# Altium PCB CL-HC-SubV2.0(change).PcbDoc (part 2 of 2)
Units mm, origin at the board's own origin, x right, y up, seen from the top; angles counter-clockwise.
Board outline 326.29 x 232.51 mm, 2 copper layers (TopLayer, BottomLayer); 149 components, 528 nets, 577 pads, 1 vias.
Unrouted connection lines stored in the file: 44.
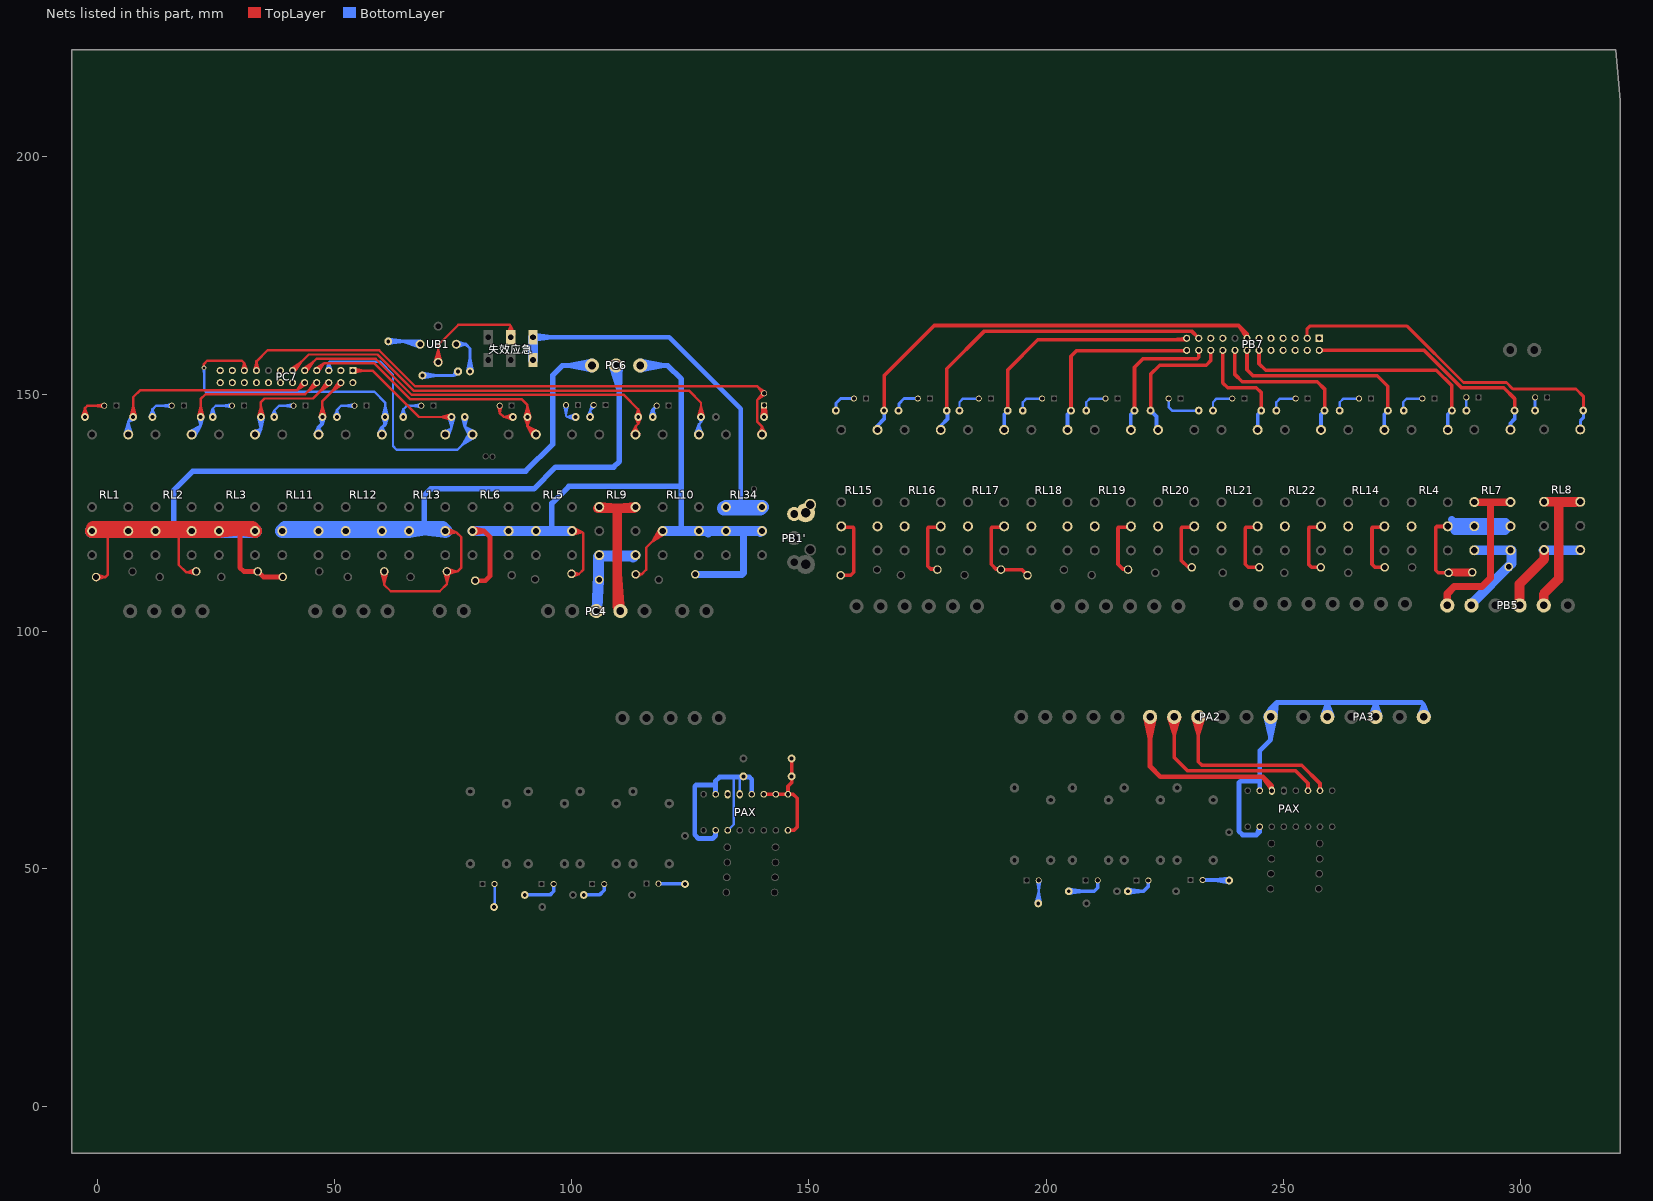
[diagram p2: the nets of this part, all layers, seen from the top]

## Via types
v1: diameter 1.016, hole 0.61, TopLayer to BottomLayer, tented both sides, 1 vias

## Nets (pads, with @x,y where several pads share a name; then routed paths per layer and width w, separated by ;. In a path a pad name is that pad's centre, name@x,y a point inside that pad or via, vN(x,y) a via of type N, cw(c..) or ccw(c..) an arc to the next point about the centre after c; other vN are vias at no path point) (continued)
GND: D110.K PA2.1 PA3.2 PA3.4 PA3.6 PAX.3 PAX.4 PAX.6@132.874,58.097 PAX.7@135.414,65.717 PAX.9@137.954,65.717 PB7.17 PC7.17 R220.2 RL34.1 | length 329.1
  TopLayer w0.508: PC7.17@33.096,155.044 33.588,156.905 ; PC7.17@34.079,155.044 33.588,156.905 ; RL34.1@139.35,141.675 140.124,143.193 ; RL34.1@139.837,141.514 140.124,143.193 ; RL34.1@140.124,141.489 140.124,143.193 ; D110.K@140.283,149.979 139.111,151.638 ; D110.K@140.283,150.425 139.087,148.742 ; RL34.1@140.411,141.514 140.124,143.193 ; D110.K@140.771,150.466 139.111,151.638 ; D110.K@140.771,149.937 139.087,148.742 ; RL34.1@140.898,141.675 140.124,143.193 ; 33.588,156.905 PC7.17@33.588,154.98 33.588,156.905 ; 33.588,156.905 35.941,159.258 59.436,159.258 67.056,151.638 139.111,151.638 ; 139.087,148.742 D110.K@140.548,150.202 ; 139.087,148.742 D110.K@140.548,150.202 ; 139.087,148.742 139.087,144.23 140.124,143.193 ; 139.111,151.638 D110.K@140.548,150.202
  BottomLayer w0.508: PAX.6@132.874,58.097 134.144,59.367 134.144,69.342 ; PAX.7@135.414,65.717 R220.2@135.414,69.342
  BottomLayer w1.016: PAX.4@130.334,58.097 130.334,57.028 129.705,56.399 126.72,56.399 125.935,57.184 125.935,67.411 126.217,67.693 130.334,67.693 ; PAX.3@130.334,65.717 130.334,67.693 ; PAX.9@137.954,65.717 137.954,68.834 137.446,69.342 135.414,69.342 134.144,69.342 131.159,69.342 130.334,68.517 130.334,67.693 ; PAX.3@244.973,66.479 244.973,68.455 ; PA2.1@246.286,81.906 247.272,77.466 ; PA2.1@246.425,82.531 248.55,85.062 ; PA2.1@248.234,81.772 248.55,85.062 ; PA2.1@248.258,81.906 247.272,77.466 ; PA3.2@258.24,82.18 259.218,84.97 ; 258.872,85.062 248.55,85.062 ; PA3.2@259.218,82.014 259.218,84.97 ; PA3.2@260.196,82.18 259.218,84.97 ; PA3.4@268.401,82.184 269.378,84.903 ; PA3.4@269.378,82.014 269.378,84.903 ; PA3.4@270.355,82.184 269.378,84.903 ; PA3.6@278.565,82.208 279.538,84.554 ; PA3.6@279.538,82.014 279.538,84.554 ; PA3.6@280.511,82.208 279.538,84.554 ; 244.343,57.161 244.973,57.79 ; 244.343,57.161 241.358,57.161 240.573,57.946 240.573,68.173 240.855,68.455 244.973,68.455 ; 244.343,57.161 PAX.4@244.973,58.859 ; 244.973,57.79 PAX.4@244.973,58.859 ; 244.973,57.79 PAX.4@244.973,58.859 ; 244.973,68.455 244.973,74.909 247.272,77.208 PA2.1@247.272,82.014 ; 247.272,77.466 PA2.1@247.272,82.014 ; PA2.1@247.272,82.014 247.272,83.784 ; PA2.1@247.272,82.014 248.55,85.062 ; PA2.1@247.272,82.014 247.272,83.784 ; 247.272,83.784 248.55,85.062 ; 247.272,83.784 246.32,82.292 247.272,83.784 ; 247.272,83.784 248.224,82.292 247.272,83.784 ; 259.218,84.97 259.126,85.062 269.219,85.062 ; 269.219,85.062 269.378,84.903 ; 269.219,85.062 279.03,85.062 279.538,84.554
IN2-A+: 
IN2-B-: 
IN-A+: 
IN-B-: 
L: pad.0@149.273,125.023 PB1'.3 PB1.2 RL4.4 RL7.4 RL14.4 RL15.4 RL16.4 RL17.4 RL18.4 RL19.4 RL20.4 RL21.4 RL22.4 RN1.1 RN2.1 RN3.1 RN4.1 RN5.1 RN6.1 RN11.1 RN12.1 RN13.1 RN14.1 RN21.1 | length 172.9
  TopLayer w0.762: RN1.1@156.674,111.849 158.819,111.849 159.429,112.46 159.429,121.797 159.217,122.008 RL15.4@156.907,122.008 ; RN2.1@177.238,113.166 175.635,113.166 175.038,113.763 175.038,121.797 175.25,122.008 RL16.4@177.561,122.008 ; RN3.1@190.455,113.053 194.84,113.053 RN4.1@196.044,111.849 ; RN3.1@190.592,113.166 189.373,113.166 188.391,114.148 188.391,121.797 188.603,122.008 RL17.4@190.914,122.008 ; RN5.1@217.298,113.166 216.079,113.166 215.097,114.148 215.097,121.797 215.309,122.008 RL19.4@217.62,122.008 ; RN6.1@230.648,113.166 RN6.1@230.651,113.166 ; RN6.1@230.648,113.517 229.885,113.517 228.451,114.951 228.451,121.797 228.662,122.008 RL20.4@230.973,122.008 ; RL21.4@244.435,122.008 242.124,122.008 241.912,121.797 241.912,114.148 242.543,113.517 RN12.1@244.581,113.517 ; RL22.4@257.788,122.008 255.477,122.008 255.265,121.797 255.265,114.148 255.896,113.517 RN13.1@257.826,113.517 RN13.1@257.934,113.517 ; RL14.4@271.141,122.008 268.83,122.008 268.618,121.797 268.618,114.148 269.249,113.517 RN14.1@271.288,113.517 ; RL4.4@284.564,122.129 282.254,122.129 282.042,121.917 282.042,112.922 282.607,112.357 RN21.1@284.71,112.357
  TopLayer w1.524: RN21.1@284.71,112.357 284.826,112.473 RN11.1@289.745,112.473 ; 286.263,112.357 RN11.1@289.36,112.357
  BottomLayer w1.524: RL4.4@284.584,122.169 284.612,122.197 RL7.4@290.173,122.197 RL7.4@297.793,122.197 ; 285.431,123.619 285.895,123.155 296.835,123.155 RL7.4@297.793,122.197 ; 285.895,121.239 286.026,121.109 296.704,121.109 RL7.4@297.793,122.197
LAMP1: 
LAMP2: 
LAMP3: 
LAMP4: 
LAMP5: 
LAMP6: 
LAMP7: 
LAMP8: 
LAMP9: 
LAMP10: 
LAMP11: 
LAMP12: 
LAMP13: 
LAMP14: 
LOUT1: 
LOUT2: 
LOUT3: 
LOUT4: 
LOUT5: 
LOUT6: 
LOUT7: 
LOUT8: 
LOUT9: 
LOUT10: 
LOUT11: 
LOUT12: 
LOUT13: 
LOUT14: 
L加热: PC6.2 RL11.4 RL12.4 RL13.4 RN10.1 RN17.1 | length 311.1
  TopLayer w0.508: RN10.1@59.885,112.569 60.525,110.231 RN10.1@61.165,112.569 ; RN10.1@60.525,112.655 60.525,109.824 61.873,108.476 72.198,108.476 73.733,110.011 RN17.1@73.733,112.655 75.969,112.655 ; RN17.1@73.093,112.569 73.733,110.231 RN17.1@74.373,112.569 ; RL13.4@73.334,120.884 74.465,120.873 ; RL13.4@73.355,120.882 75.764,120.873 ; RL13.4@73.407,120.374 75.764,120.873 ; RL13.4@73.425,121.452 75.764,120.873 ; RL13.4@73.448,120.377 74.465,120.873 ; RL13.4@73.483,121.435 74.465,120.873 ; RL13.4@73.6,121.932 75.764,120.873 ; RN17.1@73.826,112.016 75.969,112.655 ; RN17.1@73.826,113.294 75.969,112.655 ; RL13.4@73.838,121.815 74.465,120.873 ; 74.465,120.873 75.764,120.873 ; 74.465,120.873 RL13.4@73.373,121.169 75.764,120.873 ; 75.764,120.873 76.768,119.869 76.768,113.455 75.969,112.655
  BottomLayer w1.143: 68.99,121.751 68.99,128.745 70.303,130.058 92.024,130.058 96.592,134.626 108.844,134.626 110.045,135.827 110.045,155.373 PC6.2@109.368,156.05 110.045,150.909 ; PC6.2@108.462,155.847 110.045,150.909 ; PC6.2@110.296,156.088 110.045,150.909
  BottomLayer w3: 42.218,121.751 RL12.4@52.396,121.169 ; 49.83,121.751 RL12.4@60.016,121.169 ; 55.564,121.751 RL13.4@65.753,121.169 ; RL11.4@39.039,121.169 RL11.4@39.62,121.751 ; RL11.4@39.039,121.169 49.351,121.751 RL11.4@46.659,121.169 ; RL11.4@39.039,121.169 RL11.4@46.659,121.169 ; RL11.4@39.62,121.751 68.99,121.751 ; RL11.4@39.62,121.751 RL11.4@46.659,121.169 ; RL11.4@46.659,121.169 56.846,121.751 RL12.4@52.396,121.169 ; RL11.4@46.659,121.169 RL12.4@52.396,121.169 ; RL12.4@52.396,121.169 62.579,121.751 RL12.4@60.016,121.169 ; RL12.4@52.396,121.169 RL12.4@60.016,121.169 ; RL12.4@60.016,121.169 68.99,121.751 ; RL12.4@60.016,121.169 RL13.4@65.753,121.169 ; RL13.4@65.753,121.169 68.99,121.751 ; RL13.4@65.753,121.169 68.99,121.751 ; 68.99,121.751 72.791,121.751 RL13.4@73.373,121.169 68.99,121.751
L变频: PC6.3 RL5.4 RL6.4 RL10.4 RL34.4 RN8.1 RN9.1 RN23.1 RN24.1 | length 240.9
  TopLayer w0.508: RL5.4@99.96,120.909 102.271,120.909 ; RN8.1@99.97,112.164 101.501,112.067 ; RN8.1@100.066,111.525 101.501,112.067 ; RL5.4@100.072,120.882 102.271,120.909 ; RL5.4@100.087,121.169 102.271,120.909 ; RL5.4@100.138,120.375 102.271,120.909 ; RL5.4@100.14,121.452 102.271,120.909 ; RN8.1@100.145,112.786 101.501,112.067 ; RN8.1@100.283,112.067 101.501,112.067 ; RL5.4@100.323,121.93 102.271,120.909 ; RN23.1@113.476,112.043 114.695,112.043 ; RN23.1@113.647,111.42 114.695,112.043 ; RN23.1@113.647,112.666 114.695,112.043 ; RL10.4@118.547,121.649 117.07,119.033 ; RL10.4@118.898,120.861 115.676,117.639 115.676,113.025 114.695,112.043 ; RL10.4@118.968,121.362 117.07,119.033 ; RL10.4@119.182,121.169 117.07,119.033 ; RL10.4@119.377,120.957 117.07,119.033 ; RL10.4@119.669,120.54 117.07,119.033 ; 101.501,112.067 102.483,113.049 102.483,120.697 102.271,120.909
  TopLayer w1: RL6.4@79.11,121.169 81.58,121.169 ; RL6.4@79.171,120.623 81.58,121.169 ; RL6.4@79.171,121.716 81.58,121.169 ; RN9.1@79.682,110.712 81.834,110.712 82.798,111.676 82.798,119.951 81.58,121.169
  BottomLayer w1.143: 95.811,121.169 95.811,127.014 99.398,130.601 123.098,130.601 ; PC6.3@114.448,156.05 120.223,156.05 123.098,153.175 123.098,130.601 ; PC6.3@114.535,155.126 119.377,156.05 PC6.3@114.535,156.974 ; 123.061,121.266 123.098,121.303 123.098,130.601
  BottomLayer w1.524: RN24.1@126.04,112.043 135.911,112.043 136.192,112.324 136.192,120.861 ; RL10.4@126.802,121.169 128.791,120.618 128.548,120.861 RL10.4@126.802,121.169
  BottomLayer w2.032: RL6.4@79.11,121.169 RL6.4@86.73,121.169 RL5.4@92.467,121.169 95.811,121.169 ; RL10.4@119.182,121.169 RL10.4@126.802,121.169 RL34.4@132.504,121.169 139.429,121.169 RL34.4@139.713,120.885 ; RL34.4@132.978,121.169 RL34.4@140.124,121.169 ; 95.811,121.169 RL5.4@100.087,121.169 95.811,121.169
L预热: PC6.1 RL1.4 RL2.4 RL3.4 RN15.1 RN18.1 RN19.1 RN20.1 | length 393.6
  TopLayer w0.508: RL1.4@-1.037,121.457 1.563,121.347 ; RL1.4@-1.033,121.169 1.563,121.347 ; RL1.4@-0.997,120.883 1.563,121.347 ; RL1.4@-0.965,121.962 1.563,121.347 ; RL1.4@-0.858,120.393 1.563,121.347 ; RL1.4@-0.289,121.347 2.021,121.347 2.233,121.136 2.233,111.915 1.796,111.478 ; RN18.1@-0.204,111.478 1.796,111.478 ; RN18.1@-0.1,110.841 1.796,111.478 ; RN18.1@-0.1,112.116 1.796,111.478 ; RL2.4@19.747,121.94 17.364,120.921 ; RL2.4@19.898,120.375 17.364,120.921 ; RL2.4@19.901,121.454 17.364,120.921 ; RL2.4@19.944,121.169 17.364,120.921 ; RL2.4@19.956,120.881 17.364,120.921 ; RN19.1@20.731,113.278 18.846,112.43 ; RL2.4@20.738,120.921 17.233,120.921 17.233,114.043 18.846,112.43 ; RN19.1@20.87,112.01 18.846,112.43 ; RN19.1@20.884,112.43 18.846,112.43 ; RN19.1@20.901,112.655 18.846,112.43
  TopLayer w1: 30.122,121.751 30.122,113.431 30.898,112.655 RN20.1@33.855,112.655 35.015,111.495 RN15.1@39.129,111.495
  TopLayer w3: 2.146,121.751 RL2.4@12.324,121.169 ; 9.194,121.751 RL1.4@-1.033,121.169 RL1.4@6.587,121.169 ; 15.492,121.751 RL3.4@25.681,121.169 ; 22.503,121.751 RL2.4@12.324,121.169 ; RL1.4@6.587,121.169 16.772,121.751 RL2.4@12.324,121.169 ; RL1.4@6.587,121.169 -0.777,121.751 RL3.4@25.681,121.751 ; RL1.4@6.587,121.169 RL2.4@12.324,121.169 ; RL2.4@12.324,121.169 RL2.4@19.944,121.169 ; RL2.4@12.324,121.169 9.758,121.751 RL2.4@19.944,121.169 ; RL2.4@19.944,121.169 RL3.4@25.681,121.751 ; RL2.4@19.944,121.169 RL3.4@25.681,121.169 ; RL3.4@25.681,121.169 30.122,121.751 ; RL3.4@25.681,121.751 30.122,121.751 ; 30.122,121.751 32.72,121.751 RL3.4@33.301,121.169 30.122,121.751
  BottomLayer w1.143: 16.198,121.576 16.198,129.776 20.198,133.776 90.323,133.776 96.023,139.476 96.023,154.05 98.023,156.05 PC6.1@104.288,156.05 ; PC6.1@104.201,155.126 99.359,156.05 PC6.1@104.201,156.974
  BottomLayer w3: RL1.4@-1.033,121.169 RL1.4@6.587,121.169 RL2.4@12.324,121.169 RL2.4@19.944,121.169 RL3.4@25.681,121.169 RL3.4@33.301,121.169
NetC1_1: 
NetC14_1: 
NetC43_2: 
NetC44_2: 
NetD1_A: 
NetD6_A: 
NetD7_A: 
NetD8_A: 
NetD9_A: 
NetD10_A: 
NetD11_A: 
NetD12_A: 
NetD13_A: 
NetD14_A: 
NetD15_A: 
NetD15_K: D15.K R215.1 | length 20.6
  BottomLayer w0.762: D15.K@118.301,46.891 123.79,46.891 R215.1@123.889,46.792 ; D15.K@232.939,47.653 238.428,47.653 R215.1@238.527,47.554 235.411,47.653 ; R215.1@238.482,47.112 235.411,47.653 ; R215.1@238.51,47.999 235.411,47.653
NetD16_A: 
NetD16_K: D16.K R216.1 | length 18.2
  BottomLayer w0.762: R216.1@102.553,44.506 105.855,44.506 106.871,45.522 D16.K@106.871,46.792 ; R216.1@217.191,45.268 220.493,45.268 221.509,46.284 D16.K@221.509,47.554 ; R216.1@217.223,44.825 220.303,45.268 R216.1@217.223,45.712
NetD17_A: 
NetD17_K: D17.K R217.1 | length 22.1
  BottomLayer w0.762: R217.1@90.107,44.506 95.441,44.506 96.203,45.268 D17.K@96.203,46.806 ; R217.1@204.745,45.268 210.079,45.268 210.841,46.03 D17.K@210.841,47.568 ; R217.1@204.777,44.825 207.857,45.268 R217.1@204.777,45.712
NetD18_A: 
NetD18_K: D18.K R218.1 | length 21.1
  BottomLayer w0.508: R218.1@83.655,41.966 83.757,42.068 D18.K@83.757,46.806 ; R218.1@197.73,42.822 198.395,45.083 ; D18.K@198.05,47.539 198.395,45.444 D18.K@198.74,47.539 ; D18.K@198.395,47.568 198.395,42.83 R218.1@198.293,42.728 198.395,45.083 ; R218.1@198.863,42.773 198.395,45.083
NetD19_A: 
NetD20_A: 
NetD21_A: 
NetD22_A: 
NetD23_A: 
NetD24_A: 
NetD25_A: 
NetD26_A: 
NetD27_A: 
NetD28_A: 
NetD29_A: 
NetD30_A: 
NetD31_A: 
NetD32_A: 
NetD33_A: 
NetD34_A: 
NetD35_K: 
NetD36_K: 
NetD37_K: D37.K R147.1 | length 8.5
  BottomLayer w0.508: D37.K@225.768,149.081 225.768,147.303 226.521,146.55 R147.1@232.131,146.55
NetD38_K: D38.K R148.1 | length 6.2
  BottomLayer w0.508: R148.1@208.417,146.541 208.417,148.319 209.179,149.081 D38.K@212.481,149.081
NetD39_K: D39.K R149.1 | length 6.2
  BottomLayer w0.508: R149.1@195.066,146.541 195.066,148.319 195.828,149.081 D39.K@199.13,149.081
NetD40_K: D40.K R150.1 | length 6.2
  BottomLayer w0.508: R150.1@181.715,146.541 181.715,148.319 182.477,149.081 D40.K@185.779,149.081
NetD41_K: D41.K R151.1 | length 5.8
  BottomLayer w0.635: R151.1@169.015,146.541 169.015,148.065 170.031,149.081 D41.K@172.825,149.081
NetD42_K: D42.K R152.1 | length 5.8
  BottomLayer w0.635: R152.1@155.664,146.541 155.664,148.065 156.68,149.081 D42.K@159.474,149.081
NetD43_K: D43.K R153.1 | length 2.8
  BottomLayer w0.635: R153.1@302.984,146.55 D43.K@302.984,149.335
NetD44_K: D44.K R154.1 | length 2.8
  BottomLayer w0.508: R154.1@288.506,146.541 D44.K@288.506,149.335
NetD45_K: D45.K R155.1 | length 6.2
  BottomLayer w0.508: R155.1@261.821,146.541 261.821,148.319 262.583,149.081 D45.K@265.885,149.081
NetD46_K: D46.K R156.1 | length 6.2
  BottomLayer w0.508: R156.1@235.119,146.541 235.119,148.319 235.881,149.081 D46.K@239.183,149.081
NetD47_K: D47.K R157.1 | length 6.2
  BottomLayer w0.508: R157.1@248.47,146.541 248.47,148.319 249.232,149.081 D47.K@252.534,149.081
NetD48_K: D48.K R158.1 | length 6.2
  BottomLayer w0.508: R158.1@275.173,146.541 275.173,148.319 275.935,149.081 D48.K@279.237,149.081
NetD49_K: D49.K R159.1 | length 5.8
  BottomLayer w0.762: R159.1@116.65,145.258 117.09,146.753 ; R159.1@117.09,145.194 117.09,146.753 ; R159.1@117.53,145.258 117.09,146.753 ; D49.K@117.912,147.574 117.09,146.753
NetD50_K: D50.K R160.1 | length 13.8
  BottomLayer w0.508: R160.1@23.817,145.288 24.38,146.935 ; R160.1@24.38,145.194 24.38,146.935 ; R160.1@24.944,145.288 24.38,146.935 ; D50.K@28.42,147.229 26.324,147.574 D50.K@28.42,147.919 ; D50.K@28.448,147.574 25.019,147.574 24.38,146.935
NetD51_K: D51.K R161.1 | length 13.5
  BottomLayer w0.508: R161.1@11.118,145.295 11.68,146.808 ; R161.1@11.68,145.194 11.68,146.808 ; R161.1@12.243,145.295 11.68,146.808 ; D51.K@15.72,147.229 13.624,147.574 D51.K@15.72,147.919 ; D51.K@15.748,147.574 12.446,147.574 11.68,146.808
NetD52_K: D52.K R162.1 | length 14.1
  TopLayer w0.508: R162.1@-3.108,145.282 -2.544,147.062 ; R162.1@-2.544,145.194 -2.544,147.062 ; R162.1@-1.979,145.282 -2.544,147.062 ; D52.K@1.496,147.229 -0.6,147.574 D52.K@1.496,147.919 ; D52.K@1.524,147.574 -2.032,147.574 -2.544,147.062
NetD53_K: D53.K R163.1 | length 13.2
  BottomLayer w0.508: R163.1@63.95,145.295 64.512,146.808 ; R163.1@64.512,145.194 64.512,146.808 ; R163.1@65.075,145.295 64.512,146.808 ; D53.K@68.298,147.229 66.202,147.574 D53.K@68.298,147.919 ; D53.K@68.326,147.574 65.278,147.574 64.512,146.808
NetD54_K: D54.K R164.1 | length 12.8
  BottomLayer w0.508: R164.1@49.982,145.304 50.542,146.681 ; R164.1@50.542,145.194 50.542,146.681 ; R164.1@51.103,145.304 50.542,146.681 ; D54.K@54.217,147.229 52.121,147.574 D54.K@54.217,147.919 ; D54.K@54.245,147.574 51.435,147.574 50.542,146.681
NetD55_K: D55.K R165.1 | length 12.8
  BottomLayer w0.508: R165.1@36.776,145.314 37.334,146.554 ; R165.1@37.334,145.194 37.334,146.554 ; R165.1@37.893,145.314 37.334,146.554 ; D55.K@41.374,147.229 39.278,147.574 D55.K@41.374,147.919 ; D55.K@41.402,147.574 38.354,147.574 37.334,146.554
NetD56_K: 
NetD57_K: 
NetD58_K: 
NetD59_K: 
NetD60_K: 
NetD61_K: D61.K R171.1 | length 11.5
  TopLayer w0.508: D61.K@84.492,147.534 84.836,146.07 ; D61.K@84.836,147.574 84.836,146.07 ; D61.K@85.18,147.534 84.836,146.07 ; R171.1@87.545,144.629 85.712,145.194 ; R171.1@87.545,145.759 85.712,145.194 ; R171.1@87.63,145.194 85.712,145.194 ; 84.836,146.07 85.712,145.194
NetD62_K: 
NetD63_K: 
NetD64_K: 
NetD65_K: D65.K R175.1 | length 12.2
  BottomLayer w0.508: D65.K@98.461,147.673 98.806,145.577 D65.K@99.151,147.673 ; D65.K@98.806,147.701 98.806,145.457 99.068,145.194 ; R175.1@100.755,144.63 99.068,145.194 ; R175.1@100.755,145.758 99.068,145.194 ; R175.1@100.847,145.194 99.068,145.194
NetD66_K: 
NetD67_K: D67.K R177.1 | length 9.7
  BottomLayer w0.508: R177.1@103.327,145.312 103.886,146.584 ; R177.1@103.886,145.194 103.886,146.584 ; D67.K@104.318,147.875 103.886,146.584 ; R177.1@104.445,145.312 103.886,146.584 ; D67.K@104.893,147.5 103.886,146.584 ; 103.886,146.584 104.629,147.328 D67.K@104.629,147.724 103.886,146.584
NetD71_A: 
NetD72_K: 
NetD73_K: 
NetD74_A: 
NetD74_K: 
NetD75_A: 
NetD75_K: 
NetD76_K: 
NetD77_K: 
NetD78_K: 
NetD79_K: 
NetD80_K: 
NetD81_K: 
NetD82_K: 
NetD83_K: 
NetD84_K: 
NetD85_K: 
NetD86_K: 
NetD87_K: 
NetD88_K: 
NetD89_K: 
NetD90_K: 
NetD91_K: 
NetD92_K: 
NetD93_K: 
NetD94_K: 
NetD95_A: 
NetD96_A: 
NetD97_A: 
NetD98_A: 
NetD99_A: 
NetD100_A: 
NetD101_A: 
NetD102_A: 
NetD103_A: 
NetD104_A: 
NetD105_A: 
NetD106_A: 
NetD106_K: 
NetD107_A: 
NetD107_K: 
NetD108_A: 
NetD108_K: 
NetD109_A: 
NetD110_A: D110.A R292.2 | length 35.1
  TopLayer w0.508: R292.2@139.981,145.264 D110.A@140.548,147.544 ; D110.A@140.206,147.713 R292.2@140.059,145.577 ; D110.A@140.218,147.556 R292.2@141.037,145.577 ; D110.A@140.877,147.556 R292.2@140.059,145.577 ; D110.A@140.89,147.713 R292.2@141.037,145.577 ; R292.2@141.115,145.264 D110.A@140.548,147.544 ; R292.2@140.059,145.577 D110.A@140.548,147.662 ; R292.2@140.548,145.538 140.893,147.634 R292.2@140.548,145.538 ; R292.2@140.548,145.538 140.203,147.634 R292.2@140.548,145.538 ; R292.2@140.548,145.538 D110.A@140.548,147.662 ; R292.2@140.548,145.538 D110.A@140.548,147.662 ; D110.A@140.548,147.544 R292.2@140.548,145.194 D110.A@140.548,147.662 ; D110.A@140.548,147.662 R292.2@141.037,145.577
NetD199_A: 
NetDZ1_K: 
NetF1_1: 
NetF2_1: 
NetF3_1: 
NetF4_1: 
NetF5_1: 
NetF6_1: 
NetF9_2: 
NetQ1_1: 
NetQ1_2: 
NetQ2_2: 
NetQ3_2: 
NetQ4_1: 
NetQ4_2: 
NetQ5_1: 
NetQ5_2: 
NetQ6_2: 
NetQ7_1: 
NetQ7_2: 
NetQ8_2: 
NetQ9_1: 
NetQ9_2: 
NetQ10_2: 
NetQ11_2: 
NetQ12_2: 
NetQ13_1: 
NetQ13_2: 
NetQ13_3: 
NetQ14_1: 
NetQ15_2: 
NetQ15_3: 
NetQ16_2: 
NetQ17_2: 
NetQ18_1: 
NetQ18_2: 
NetQ18_3: 
NetQ19_1: 
NetQ19_2: 
NetQ20_2: 
NetQ21_2: 
NetQ22_2: 
NetQ23_2: 
NetQ24_2: 
NetQ25_2: 
NetR15_2: 
NetR16_2: 
NetR17_2: 
NetR18_2: 
NetR19_2: 
NetR20_2: 
NetR21_2: 
NetR22_2: 
NetR23_2: 
NetR24_2: 
NetR25_2: 
NetR26_2: 
NetR27_2: 
NetR28_2: 
NetR29_2: 
NetR30_2: 
NetR31_2: 
NetR32_2: 
NetR33_2: 
NetR34_2: 
NetR36_1: 
NetR68_2: 
NetR69_2: 
NetR70_2: 
NetR71_2: 
NetR88_1: 
NetR89_1: 
NetR91_2: 
NetR92_1: 
NetR93_2: 
NetR94_2: 
NetR95_2: 
NetR96_2: 
NetR97_2: 
NetR98_2: 
NetR178_2: 
NetR179_1: LX1.A R179.1 | length 16.4
  BottomLayer w0.635: R179.1@68.554,153.954 75.183,153.954 ; R179.1@68.596,153.448 71.626,153.954 R179.1@68.596,154.461 ; LX1.A@75.612,155.086 75.183,153.954 ; LX1.A@76.039,154.81 75.183,153.954 ; LX1.A@76.315,154.383 75.183,153.954
NetR179_2: R179.2 UB1.3 | length 24.6
  BottomLayer w0.762: R179.2@61.369,161.139 67.461,161.139 UB1.3@68.072,160.528 64.55,161.139 ; R179.2@61.398,160.695 64.823,161.139 R179.2@61.398,161.582 ; UB1.3@67.93,159.975 64.55,161.139 ; UB1.3@68.124,161.097 64.55,161.139
NetR192_1: 
NetR196_2: 
NetR197_1: 
NetR199_1: 
NetR200_2: 
NetR201_2: 
NetR204_1: 
NetR209_1: 
NetR211_2: 
NetR212_1: 
NetR213_2: 
NetR293_1: 
NetR294_1: 
NetRL34_5: RL34.5 失效应急.3 失效应急.6 | length 125.2
  BottomLayer w1: 失效应急.6@91.858,162.019 120.572,162.019 135.636,146.954 135.636,127.489 ; 失效应急.6@91.89,161.52 95.858,162.019 失效应急.6@91.89,162.518
  BottomLayer w2.032: 失效应急.3@91.858,157.219 失效应急.6@91.858,162.019 91.858,157.719 91.858,161.519 失效应急.3@91.858,157.219
  BottomLayer w3: RL34.5@132.093,125.965 139.713,125.965 RL34.5@132.504,126.249 RL34.5@140.124,126.249 RL34.5@132.093,125.965
NetU1X_2: UB1.2 失效应急.5 | length 33.6
  TopLayer w0.508: UB1.2@71.19,156.817 71.882,159.195 UB1.2@72.574,156.817 ; UB1.2@71.882,156.718 71.882,160.352 76.122,164.592 86.93,164.592 87.158,164.364 ; 失效应急.5@86.428,162.67 87.158,164.364 ; 失效应急.5@87.158,162.019 87.158,164.364 ; 失效应急.5@87.158,162.519 87.158,164.364 ; 失效应急.5@87.889,162.67 87.158,164.364
NetU1X_4: LX1.K UB1.4 | length 17.6
  BottomLayer w0.635: UB1.4@75.692,160.528 77.698,160.528 ; UB1.4@75.793,159.901 77.698,160.528 ; UB1.4@75.793,161.155 77.698,160.528 ; LX1.K@78.073,154.857 78.579,157.54 LX1.K@79.085,154.857 ; LX1.K@78.579,154.81 78.579,159.647 77.698,160.528
NetU42_2: 
NetU55_2: 
OSC1: 
OSC2: 
OSC3: 
OSC4: 
OUT1: 
OUT2: 
OUT3: 
OUT4: 
OUT5: 
OUT6: 
OUT7: 
OUT8: 
OUT9: 
OUT10: 
OUT11: 
OUT12: 
OUT13: 
OUT14: 
OUT15: 
OUT15X: 
OUT16: 
OUT17: 
OUT18: 
OUT19: 
OUT20: 
OUT21: 
OUT22: 
OUT23: 
OUT24: 
OUT25: 
OUT26: 
OUT27: 
OUT28: 
OUT29: 
OUT30: 
OUT31: 
OUT32: 
PLD_165: 
POL_A2: 
POL_B2: 
RESET1: 
RESET2: 
ROUT1: PB7.2 PC7.2 R154.2 RL7.2 | length 52.6
  TopLayer w0.762: PB7.2@257.518,159.241 279.596,159.241 287.47,151.367 296.38,151.367 298.666,149.081 R154.2@298.666,146.541 ; RL7.2@298.028,142.489 RL7.2@298.28,142.74
  BottomLayer w0.762: RL7.2@297.793,142.517 297.793,143.89 298.666,144.763 R154.2@298.666,146.541
ROUT2: PB7.4 PC7.1 R163.2 RL13.2 | length 50.4
  TopLayer w0.508: PC7.1@53.908,154.98 58.05,154.98 67.836,145.194 R163.2@74.672,145.194 ; PC7.1@53.962,154.487 56.182,154.98 PC7.1@53.962,155.473 ; R163.2@74.603,144.627 72.323,145.194 R163.2@74.603,145.762
  BottomLayer w0.508: RL13.2@72.945,142.161 74.672,142.789 ; RL13.2@73.186,141.708 74.672,142.789 ; RL13.2@73.373,141.489 74.672,142.789 ; RL13.2@73.592,141.302 74.672,142.789 ; RL13.2@74.044,141.062 74.672,142.789 ; R163.2@74.105,145.125 74.672,142.845 R163.2@75.24,145.125 ; R163.2@74.672,145.194 74.672,142.789
ROUT3: PB7.6 PC7.6 R160.2 RL3.2 | length 44.2
  TopLayer w0.508: R160.2@33.973,145.264 34.54,147.544 R160.2@35.108,145.264 ; R160.2@34.54,145.194 34.54,148.34 35.298,149.098 45.485,149.098 PC7.6@48.828,152.44 47,150.613 ; PC7.6@48.445,152.756 47,150.613 ; PC7.6@49.143,152.058 47,150.613
  BottomLayer w0.635: RL3.2@32.903,142.104 34.54,142.728 ; RL3.2@33.301,141.489 34.54,142.728 ; RL3.2@33.916,141.091 34.54,142.728 ; R160.2@34.035,145.142 34.54,142.728 ; R160.2@34.54,145.194 34.54,142.728 ; R160.2@35.046,145.142 34.54,142.728
ROUT4: PB7.8 PC7.8 R161.2 RL2.2 | length 60.9
  TopLayer w0.508: R161.2@21.273,145.264 21.84,147.544 R161.2@22.408,145.264 ; R161.2@21.84,145.194 21.84,148.967 22.86,149.987 43.834,149.987 PC7.8@46.288,152.44 44.46,150.613 ; PC7.8@45.905,152.756 44.46,150.613 ; PC7.8@46.603,152.058 44.46,150.613
  BottomLayer w0.508: RL2.2@19.471,142.129 21.84,143.385 ; RL2.2@19.752,141.704 21.84,143.385 ; RL2.2@19.944,141.489 21.84,143.385 ; RL2.2@20.159,141.297 21.84,143.385 ; RL2.2@20.584,141.016 21.84,143.385 ; R161.2@21.276,145.104 21.84,143.385 ; R161.2@21.84,145.194 21.84,143.385 ; R161.2@22.405,145.104 21.84,143.385
ROUT5: PB7.10 PC7.10 R162.2 RL1.2 | length 70.2
  TopLayer w0.508: R162.2@7.049,145.264 7.616,147.544 R162.2@8.184,145.264 ; R162.2@7.616,145.194 7.616,149.348 9.144,150.876 42.183,150.876 ; PC7.10@43.36,152.749 42.183,150.876 ; PC7.10@44.057,152.052 42.183,150.876 ; 42.183,150.876 PC7.10@43.748,152.44 42.183,150.876
  BottomLayer w0.508: RL1.2@5.801,141.612 6.587,144.063 ; RL1.2@6.299,141.505 6.587,144.063 ; RL1.2@6.587,141.489 6.587,144.165 ; RL1.2@6.875,141.505 6.587,144.063 ; R162.2@7.141,145.511 6.587,144.165 ; RL1.2@7.373,141.612 6.587,144.063 ; R162.2@7.616,145.194 6.587,144.165 ; R162.2@7.933,144.719 6.587,144.165
ROUT6: PB7.12 PC7.12 R158.2 RL4.2 | length 55
  TopLayer w0.762: PB7.12@244.818,159.241 244.818,156.447 246.215,155.05 282.171,155.05 285.458,151.763 R158.2@285.458,146.541
  BottomLayer w0.762: RL4.2@284.584,142.489 284.584,145.792 R158.2@285.333,146.541
ROUT7: PB7.14 PC7.14 R155.2 RL14.2 | length 44.9
  TopLayer w0.762: PB7.14@242.278,159.241 242.278,155.177 243.548,153.907 269.71,153.907 271.968,151.649 R155.2@271.968,146.532
  BottomLayer w0.762: RL14.2@271.233,142.489 271.233,145.792 R155.2@271.981,146.541 ; RL14.2@271.3,142.304 RL14.2@271.3,142.489
ROUT8: PB7.16 PC7.16 R157.2 RL22.2 | length 34.2
  TopLayer w0.762: PB7.16@239.738,159.241 239.738,154.161 241.262,152.637 257.102,152.637 258.63,151.108 R157.2@258.63,146.541
  BottomLayer w0.762: RL22.2@257.882,142.489 257.882,145.792 R157.2@258.63,146.541
ROUT9: PB7.18 PC7.18 R156.2 RL21.2 | length 24
  TopLayer w0.762: PB7.18@237.198,159.241 237.198,152.383 238.214,151.367 244.263,151.367 245.279,150.351 R156.2@245.279,146.541
  BottomLayer w0.762: RL21.2@244.531,142.489 244.531,145.792 R156.2@245.279,146.541
ROUT10: PB7.20 PC7.20 R147.2 RL20.1 | length 28.4
  TopLayer w0.762: R147.2@221.971,146.55 221.971,154.174 223.924,156.127 233.677,156.127 234.658,157.108 PB7.20@234.658,159.241
  BottomLayer w0.762: R147.2@221.971,146.55 223.228,145.294 223.228,142.821 RL20.1@223.56,142.489
ROUT11: PB7.22 PC7.22 R148.2 RL19.2 | length 29.4
  TopLayer w0.762: R148.2@218.577,146.541 218.577,155.685 220.379,157.487 231.833,157.487 232.118,157.772 PB7.22@232.118,159.241
  BottomLayer w0.762: RL19.2@217.829,142.489 217.829,145.792 R148.2@218.577,146.541
ROUT12: PB7.24 PC7.24 R149.2 RL18.2 | length 43.8
  TopLayer w0.762: R149.2@205.213,146.532 205.213,157.99 206.342,159.119 229.456,159.119 PB7.24@229.578,159.241 226.519,159.119
  BottomLayer w0.762: RL18.2@204.478,142.489 204.478,145.792 R149.2@205.226,146.541
ROUT13: PB7.23 PC7.23 R150.2 RL17.2 | length 56.6
  TopLayer w0.762: R150.2@191.862,146.532 191.862,155.121 198.188,161.447 229.244,161.447 PB7.23@229.578,161.781 226.453,161.447
  BottomLayer w0.762: RL17.2@191.127,142.489 191.127,145.792 R150.2@191.875,146.541
ROUT14: PB7.21 PC7.21 R151.2 RL16.2 | length 70.5
  TopLayer w0.762: R151.2@179.032,146.532 179.032,155.349 186.988,163.305 230.594,163.305 PB7.21@232.118,161.781
  BottomLayer w0.762: RL16.2@177.775,142.489 177.775,143.363 179.175,144.763 R151.2@179.175,146.541
ROUT15: 
ROUT15X: 
ROUT16: 
ROUT17: 
ROUT18: 
ROUT19: 
ROUT20: 
ROUT21: 
ROUT22: PB7.13 PC7.13 R152.2 RL15.2 | length 98.6
  TopLayer w0.762: R152.2@165.824,146.541 165.824,153.872 176.421,164.469 240.535,164.469 ; 240.535,164.469 242.278,162.727 ; 240.535,164.469 PB7.13@242.278,161.781 ; PB7.13@242.278,161.781 242.278,162.727 ; PB7.13@242.278,161.781 242.278,162.727
  BottomLayer w0.762: RL15.2@164.424,142.489 164.424,143.363 165.824,144.763 R152.2@165.824,146.541
ROUT23: PB7.11 PC7.11 R159.2 RL10.2 | length 121.8
  TopLayer w0.508: PC7.11@40.892,155.363 43.035,156.808 ; PC7.11@41.59,154.665 43.035,156.808 ; R159.2@126.683,145.264 127.25,147.544 R159.2@127.818,145.264 ; R159.2@127.25,145.194 127.25,148.213 124.714,150.749 66.688,150.749 59.068,158.369 44.596,158.369 PC7.11@41.208,154.98 43.035,156.808
  BottomLayer w0.508: RL10.2@126.02,141.637 126.802,143.637 ; RL10.2@126.514,141.509 126.802,143.637 ; R159.2@126.698,145.047 127.25,144.086 ; RL10.2@126.802,141.489 126.802,143.637 ; RL10.2@127.089,141.509 126.802,143.637 ; R159.2@127.25,145.194 127.25,144.086 ; RL10.2@127.584,141.637 126.802,143.637 ; R159.2@127.803,145.047 127.25,144.086 ; 126.802,143.637 127.25,144.086
ROUT24: PB7.9 PC7.9 R177.2 RL9.2 | length 101.9
  TopLayer w0.508: PC7.9@43.432,155.363 45.575,156.808 ; PC7.9@44.13,154.665 45.575,156.808 ; RL9.2@112.671,141.677 113.445,143.176 ; RL9.2@113.158,141.514 113.445,143.176 ; RL9.2@113.445,141.489 113.445,143.176 ; R177.2@113.483,145.295 114.046,146.812 ; R177.2@113.486,145.079 114.046,143.778 ; RL9.2@113.732,141.514 113.445,143.176 ; RL9.2@114.218,141.677 113.445,143.176 ; R177.2@114.606,145.079 114.046,143.778 ; R177.2@114.609,145.295 114.046,146.812 ; 45.575,156.808 PC7.9@43.748,154.98 46.247,157.48 58.7,157.48 66.32,149.86 110.998,149.86 114.046,146.812 ; 113.445,143.176 114.046,143.778 ; 114.046,143.778 R177.2@114.046,145.194 114.046,146.812
ROUT25: PB7.7 PC7.7 R175.2 RL5.1 | length 81
  TopLayer w0.508: PC7.7@45.978,155.368 47.862,156.555 ; PC7.7@46.675,154.671 47.862,156.555 ; R175.2@90.12,145.264 90.687,147.544 R175.2@91.254,145.264 ; R175.2@90.122,145.109 90.687,143.27 ; R175.2@91.252,145.109 90.687,143.27 ; RL5.1@91.823,141.022 90.687,143.27 ; RL5.1@92.252,141.298 90.687,143.27 ; RL5.1@92.467,141.489 90.687,143.27 ; RL5.1@92.659,141.704 90.687,143.27 ; RL5.1@92.934,142.134 90.687,143.27 ; 47.862,156.555 PC7.7@46.288,154.98 47.862,156.555 ; 47.862,156.555 58.367,156.555 65.951,148.971 89.408,148.971 90.687,147.692 R175.2@90.687,145.194 90.687,143.27
ROUT26: PB7.5 PC7.5 R171.2 RL6.1 | length 84.7
  BottomLayer w0.508: PC7.5@48.337,155.054 48.828,156.651 ; PC7.5@49.318,155.054 48.828,156.651 ; R171.2@76.904,145.115 77.47,143.129 ; R171.2@77.47,145.194 77.47,143.129 ; R171.2@78.036,145.115 77.47,143.129 ; RL6.1@78.459,141.031 77.47,143.129 ; RL6.1@78.478,141.973 76.983,139.362 ; RL6.1@78.894,141.299 77.47,143.129 ; RL6.1@78.897,141.683 76.983,139.362 ; RL6.1@79.301,141.705 77.47,143.129 ; RL6.1@79.304,141.276 76.983,139.362 ; RL6.1@79.568,142.14 77.47,143.129 ; RL6.1@79.594,140.857 76.983,139.362 ; 48.828,156.651 49.055,156.878 59.593,156.878 62.357,154.115 62.357,139.065 63.119,138.303 75.924,138.303 RL6.1@79.11,141.489 77.47,143.129 ; 48.828,156.651 PC7.5@48.828,154.98 48.828,156.651
ROUT27: PB7.3 PC7.3 R153.2 RL8.2 | length 73.8
  TopLayer w0.635: PB7.3@254.978,161.781 254.978,163.813 255.486,164.321 276.043,164.321 287.918,152.446 296.946,152.446 298.28,151.113 311.62,151.113 313.144,149.589 R153.2@313.144,146.55
  BottomLayer w0.635: RL8.2@312.509,142.584 312.509,144.382 313.144,145.017 R153.2@313.144,146.55
ROUT28: PB7.1 PC7.4 R165.2 RL11.2 | length 31.1
  TopLayer w0.508: R165.2@46.927,145.264 47.494,147.544 R165.2@48.062,145.264 ; R165.2@47.494,145.194 47.494,148.567 PC7.4@51.368,152.44 49.54,150.613 ; PC7.4@50.985,152.756 49.54,150.613 ; PC7.4@51.683,152.058 49.54,150.613
  BottomLayer w0.762: RL11.2@46.007,141.639 46.659,142.985 ; RL11.2@46.659,141.489 46.659,142.985 ; R165.2@47.056,145.122 47.494,143.82 ; RL11.2@47.311,141.639 46.659,142.985 ; R165.2@47.494,145.194 47.494,143.82 ; R165.2@47.933,145.122 47.494,143.82 ; 46.659,142.985 47.494,143.82
ROUT29: PB7.19 PC7.19 R164.2 RL12.2 | length 78.5
  TopLayer w0.508: v1(22.519,155.558) 22.519,156.372 23.216,157.068 30.508,157.068 31.048,156.529 ; PC7.19@30.558,155.06 31.048,156.529 ; PC7.19@31.048,154.98 31.048,156.529 ; PC7.19@31.537,155.06 31.048,156.529
  BottomLayer w0.508: 22.586,153.524 v1(22.519,155.558) 22.519,155.619 22.586,155.685 22.586,150.896 22.947,150.535 54.316,150.535 58.421,150.535 60.702,148.254 R164.2@60.702,145.194 ; R164.2@60.135,145.264 60.702,147.544 R164.2@61.27,145.264
  BottomLayer w0.762: RL12.2@59.365,141.643 60.016,142.947 ; RL12.2@60.016,141.489 60.016,142.947 ; R164.2@60.262,145.131 60.702,143.633 ; RL12.2@60.667,141.643 60.016,142.947 ; R164.2@60.702,145.194 60.702,143.633 ; R164.2@61.142,145.131 60.702,143.633 ; 60.016,142.947 60.702,143.633
ROUT30: 
ROUT31: 
ROUT32: 
RX: 
RX2: 
RX3: 
SDO_165: 
TX: 
TX2: 
TX3: 
VCC: 
VPP1: 
VPP2: 
三角接法: PC4.2 RL9.5 | length 44.7
  TopLayer w2.032: RL9.5@105.534,125.965 109.636,125.965 ; RL9.5@105.825,126.249 109.636,125.965 ; 109.636,112.161 PC4.2@110.273,104.318 ; PC4.2@110.262,104.605 109.636,105.231 109.636,125.965 ; RL9.5@113.154,125.965 109.636,125.965 ; RL9.5@113.445,126.249 109.636,125.965
中效: 
亚高效: 
冷/热水: 
冷水阀执行: 
初效: 
加湿器控制: 
变频值机: 
变频全速: 
变频开启: 
回风压差: 
回风温度: 
回风湿度: 
备用AO1: 
备用AO2: 
备用AO3: 
外急停开关: 
大地: PA2.6 PAX.5 | length 52.7
  TopLayer w1.016: PA2.6@220.886,81.906 221.872,77.466 PA2.6@222.858,81.906 ; PA2.6@221.872,82.014 221.872,71.567 224.041,69.398 245.639,69.398 ; PAX.5@247.513,66.479 247.513,67.525 ; 245.639,69.398 247.513,67.525 ; 245.639,69.398 PAX.5@247.513,66.733 ; PAX.5@247.513,66.733 247.513,67.525 ; PAX.5@247.513,66.733 247.513,67.525
定量关: PB5.5 RL8.5 | length 38.2
  TopLayer w2.032: PB5.5@304.784,105.555 304.784,107.872 307.936,111.024 307.936,127.249 311.379,127.249 ; RL8.5@304.889,127.344 RL8.5@312.509,127.344 ; RL8.5@304.92,127.365 309.097,127.365
定量开: PB5.4 RL8.3 | length 21.4
  TopLayer w2.032: PB5.4@299.704,105.555 299.704,110.018 304.889,115.202 RL8.3@304.889,117.184
  BottomLayer w2.032: RL8.3@304.753,117.155 RL8.3@312.373,117.155
密闭关: PB5.1 RL7.5 | length 36.5
  TopLayer w1.524: PB5.1@284.464,105.555 284.464,107.97 285.961,109.467 291.795,109.467 293.585,111.256 293.585,127.249 ; RL7.5@290.408,127.249 293.585,127.249 ; RL7.5@298.028,127.249 293.585,127.249
密闭开: PB5.2 RL7.3 RN11.2 | length 23.7
  BottomLayer w2.032: PB5.2@289.544,105.555 289.544,105.824 298.028,114.308 ; RL7.3@290.408,117.089 298.028,117.089 298.028,114.308 ; RN11.2@297.287,113.566 298.028,114.308
手动调速: 
星接法: PC4.3 RL9.3 RN23.2 | length 78.4
  BottomLayer w2.032: PC4.3@105.182,104.605 PC4.3@105.534,104.957 ; 105.534,108.899 RL9.3@105.825,116.089 ; 105.534,111.963 PC4.3@105.193,104.318 RN23.2@105.796,110.883 ; RL9.3@106.24,116.073 RL9.3@113.445,116.089 RL9.3@106.26,115.805 ; RL9.3@112.924,115.575 113.154,115.805 RL9.3@105.534,115.805 ; RL9.3@112.993,115.805 RL9.3@105.825,116.089 ; PC4.3@105.534,104.957 RL9.3@105.534,115.805 ; PC4.3@105.534,104.957 RN23.2@105.796,110.883 ; RL9.3@105.534,115.805 RN23.2@105.796,110.883 ; RN23.2@105.796,110.883 RL9.3@105.825,116.089
消防: 
热水阀执行: 
电高温: 
硬接线-温度: PA2.5 PAX.11 PAX.13@143.034,65.717 PAX.15@145.574,65.717 PAX.16@145.574,58.097 R219.1 R220.1 | length 71.5
  TopLayer w0.762: PAX.11@140.494,65.717 PAX.13@143.034,65.717 PAX.15@145.574,65.717 146.656,65.717 147.503,64.87 147.503,58.825 146.775,58.097 PAX.16@145.574,58.097 ; PAX.15@145.792,65.936 145.574,66.154 145.574,67.411 146.333,68.17 R219.1@146.333,73.248 ; PA2.5@225.845,81.849 226.952,78.228 PA2.5@228.059,81.849 ; PA2.5@226.952,82.014 226.952,77.704 226.952,73.45 229.733,70.668 252.497,70.668 255.133,68.033 PAX.11@255.133,66.479
硬接线-湿度: PA2.4 PAX.13@257.673,66.479 | length 46.1
  TopLayer w0.762: PA2.4@230.925,81.849 232.032,78.228 PA2.4@233.139,81.849 ; PA2.4@232.032,82.014 232.032,72.575 232.796,71.811 253.84,71.811 257.673,67.979 PAX.13@257.673,66.479
管温: 
缺风: 
自动门开关1: 
自动门开关2: 
自动门开关3: 
自动门开关4: 
自动门开关5: 
自动门开关6: 
设定温度: 
设定湿度: 
负压: 
远值机: 
远启动: 
防冻: 
预热温感: 
预高温: 
频率控制: 
频率选择输出: 
高效: 
pads on no net: PB1'.2 RL1.5 RL2.5 RL3.5 RL4.5 RL5.5 RL6.5 RL10.5 RL11.5 RL12.5 RL13.5 RL14.5 RL15.5 RL16.5 RL17.5 RL18.5 RL19.5 RL20.5 RL21.5 RL22.5 RL34.3 失效应急.1 失效应急.4

## Other copper
TopLayer:
  region net L: 286.06,120.351 286.466,120.757 286.466,124.952 285.789,125.628 154.937,125.628 152.789,127.776 146.578,127.776 145.801,127 145.801,124.04 147.512,122.33 153.736,122.33 155.445,120.621
BottomLayer:
  region net L: 286.06,120.351 286.466,120.757 286.466,124.952 285.789,125.628 154.937,125.628 152.789,127.776 146.578,127.776 145.801,127 145.801,124.04 147.512,122.33 153.736,122.33 155.445,120.621

## Silkscreen, mask and mechanical layers (free items; w line width, h text height)
TopOverlay:
  drawing of 7340 lines, arcs and shapes, not listed
  text "应急" at 95.473,166.125 h3 r270
  text "正常" at 102.873,165.675 h3 r270
  text "PC6" at 108.323,164.2 h3
  text "AC1" at 295.594,163.956 h3
  text "AC2" at 300.669,163.906 h3
  text "24V" at 287.003,161.372 h3
  text "PB7" at 264.376,161.273 h3
  text "预热锁定" at 123.44,160.023 h3 r270
  text "加热锁定" at 126.107,160.023 h3 r270
  text "风机锁定" at 128.774,160.02 h3 r270
  text "交流" at 286.749,159.34 h3
  text "SW1" at 94.766,158.662 h3 r270
  text "PB6" at 286.982,156.447 h3
  text "CL-HC-B-V2.0" at 174.92,151.776 h5.08
  text "应急" at 89.724,150.892 h3
  text "应急指示灯" at 72.054,150.228 h3
  text "CL-HC-C-V2.0" at -4.29,149.788 h5.08
  text "PC7" at 60.2,149.376 h3
  text "开关" at 89.755,148.527 h3
  text "(220V)" at 146.242,136.398 h3
  text "火线" at 144.752,133.916 h3
  text "PB5" at 300,110.314 h3
  text "零线" at 145.768,108.516 h3
  text "PC2" at 38.072,107.108 h3
  text "PC1" at 26.749,106.413 h3
  text "PC4" at 86.89,106.21 h3
  text "PB1" at 145.95,105.532 h3
  text "PB4" at 236.22,103.632 h3 r90
  text "PB2" at 156.776,103.372 h3 r90
  text "PB3" at 198.628,103.378 h3 r90
  text "(220V)" at 85.171,100.092 h3
  text "星接法" at 104.397,99.592 h3 r270
  text "(220V)" at 32.584,99.467 h3
  text "散热扇" at 114.938,99.465 h3 r270
  text "零线" at 6.48,99.084 h3 r270
  text "(220V)" at 132.2,98.981 h3
  text "零线" at 45.469,98.957 h3 r270
  text "变频" at 93.983,98.449 h3 r270
  text "定频" at 99.19,98.449 h3 r270
  text "电预热" at 25.573,98.375 h3 r270
  text "电加热" at 41.473,98.325 h3 r270
  text "三角" at 109.731,98.322 h3 r270
  text "2#" at 16.64,98.195 h3 r270
  text "3#" at 21.72,98.195 h3 r270
  text "1#" at 11.56,98.068 h3 r270
  text "2#" at 55.629,98.068 h3 r270
  text "3#" at 60.709,98.068 h3 r270
  text "1#" at 50.549,97.941 h3 r270
  text "PC5" at 117.925,97.418 h3
  text "(220V)" at -4.372,97.244 h3
  text "PC3" at 65.72,96.688 h3
  text "1#" at 161.286,95.626 h3 r90
  text "5#" at 213.864,95.624 h3 r90
  text "2#" at 171.446,95.605 h3 r90
  text "3#" at 181.606,95.605 h3 r90
  text "6#" at 224.024,95.592 h3 r90
  text "4#" at 203.704,95.536 h3 r90
  text "零线" at 296.723,95.045 h3 r90
  text "负压" at 261.616,94.661 h3 r90
  text "零线" at 166.366,94.637 h3 r90
  text "零线" at 176.526,94.637 h3 r90
  text "零线" at 186.686,94.637 h3 r90
  text "零线" at 208.784,94.637 h3 r90
  text "零线" at 218.944,94.637 h3 r90
  text "零线" at 229.104,94.637 h3 r90
  text "停保" at 241.296,94.642 h3 r90
  text "零线" at 246.376,94.637 h3 r90
  text "零线" at 256.536,94.637 h3 r90
  text "零线" at 266.696,94.637 h3 r90
  text "零线" at 276.856,94.637 h3 r90
  text "定量关" at 305.574,94.038 h3 r90
  text "密闭关" at 286.563,93.923 h3 r90
  text "密闭开" at 291.643,93.925 h3 r90
  text "定量开" at 302.331,93.911 h3 r90
  text "电柜扇" at 271.776,93.589 h3 r90
  text "杀菌灯" at 251.456,93.548 h3 r90
  text "AC24V" at 308.749,93.53 h3 r90
  text "零线" at 73.4,93.213 h3 r90
  text "零线" at 78.341,92.963 h3 r90
  text "零线" at 124.371,92.963 h3 r90
  text "零线" at 129.451,92.963 h3 r90
  text "排风机" at 170.534,91.548 h3
  text "排风机" at 214.017,90.74 h3
  text "AC24V" at 301.09,89.77 h3
  text "(220V)" at 201.28,89.63 h3
  text "(220V)" at 239.041,89.63 h3
  text "(220V)" at 281.369,89.516 h3
  text "(220V)" at 158.238,89.122 h3
  text "浮点阀硬接线扩展板" at 81.831,82.804 h3
  text "CL-FG-V1.0" at 81.323,77.978 h5.08
  text "PF1" at 135.679,77.724 h3
  text "回温" at 225.971,77.098 h3 r270
  text "回湿" at 231.051,77.098 h3 r270
  text "设温" at 236.639,77.098 h3 r270
  text "设湿" at 241.465,77.098 h3 r270
  text "公共" at 109.913,77.085 h3 r270
  text "F1" at 114.745,77.085 h3 r270
  text "R1" at 119.878,77.085 h3 r270
  text "F2" at 125.01,77.085 h3 r270
  text "R2" at 130.143,77.085 h3 r270
  text "运行" at 194.423,76.831 h3 r270
  text "值机" at 198.233,76.831 h3 r270
  text "滤网" at 202.805,76.831 h3 r270
  text "故障" at 207.885,76.831 h3 r270
  text "公共" at 213.219,76.831 h3 r270
  text "0V" at 246.037,76.336 h3 r270
  text "PE" at 220.891,76.082 h3 r270
  text "负压" at 253.356,73.596 h3
  text "远启" at 273.957,73.59 h3
  text "远值" at 263.797,73.57 h3
  text "PA1" at 263.788,71.124 h3
  text "PA2" at 232.665,70.456 h3
  text "PA3" at 201.81,70.39 h3
  text "情报面板硬接线扩展板" at 238.877,68.52 h3
  text "滤网" at 223.048,46.981 h3
  text "值机" at 212.196,46.948 h3
  text "运行" at 199.974,46.881 h3
  text "故障" at 229.827,44.444 h3
  text "CL-HC-A-V2.0" at 267.361,42.911 h5.08 r90
BottomSolder:
  lines w0.635: -1.033,121.169 -1.033,121.751 33.364,121.751 ; 6.848,101.151 6.848,98.477 12.024,93.301 128.439,93.301 128.439,104.318 ; 6.86,103.727 6.86,100.38 9.489,97.751 128.149,97.751 ; 9.792,95.551 128.123,95.551 ; 16.333,121.96 16.404,122.031 16.404,130.221 20.037,133.853 90.545,133.853 90.972,134.281 96.029,139.337 96.029,153.806 98.248,156.025 104.373,156.025 ; 39.039,121.169 73.373,121.169 ; 46.023,93.326 46.023,104.291 ; 68.919,121.309 68.919,128.876 70.264,130.221 92.174,130.221 96.66,134.708 108.957,134.708 110.021,135.772 110.021,155.171 109.298,155.893 ; 72.249,93.376 72.249,104.318 ; 77.329,93.376 77.329,104.318 ; 80.115,121.026 94.011,121.026 ; 92.253,120.949 99.563,120.949 ; 95.811,120.976 95.811,127.014 99.323,130.526 123.061,130.526 ; 114.448,156.05 120.233,156.05 123.061,153.223 123.061,132.05 ; 119.182,121.169 140.124,121.169 ; 123.061,121.266 123.061,135.236 ; 123.359,93.376 123.359,104.318 ; 147.627,113.031 149.06,110.531 ; 148.862,124.69 153.38,124.69 ; 149.106,104.696 149.106,111.196 ; 149.106,114.677 149.106,104.175 157.288,95.993 159.11,94.171 294.642,94.171 ; 149.661,115.962 151.792,113.089 151.792,105.518 160.414,96.896 294.642,96.896 ; 154.082,124.599 284.807,124.599 ; 154.102,123.968 147.673,124.196 150.673,125.696 153.38,124.69 ; 156.747,116.904 164.438,116.904 164.637,116.705 164.637,113.293 159.843,108.498 159.843,104.717 ; 157.763,99.886 294.642,99.886 ; 170.166,105.317 170.166,110.531 169.386,111.311 169.386,116.19 170.1,116.904 177.455,116.904 ; 175.246,93.963 175.246,105.317 ; 180.326,105.317 180.326,109.064 183.139,111.877 183.139,116.428 183.615,116.904 190.549,116.904 ; 185.406,93.963 185.406,105.317 ; 196.806,116.904 204.273,116.904 ; 202.424,105.317 202.424,111.91 202.905,112.391 202.905,116.52 ; 207.504,93.963 207.504,105.317 ; 212.584,105.916 212.584,108.174 210.097,110.66 210.097,116.842 210.16,116.904 217.29,116.904 ; 217.664,93.963 217.664,105.317 ; 222.361,105.086 222.361,107.992 223.513,109.144 223.513,116.52 223.605,116.613 230.66,116.613 ; 227.824,93.963 227.824,105.317 ; 240.342,105.732 240.342,105.898 236.938,109.303 236.938,116.152 237.69,116.904 244.307,116.904 ; 245.096,93.963 245.096,105.825 ; 250.176,105.825 250.176,117.199 250.47,116.904 257.586,116.904 ; 255.256,93.963 255.256,105.825 ; 260.536,105.455 260.536,109.512 264.133,113.109 264.133,116.16 264.876,116.904 270.403,116.904 ; 265.416,93.963 265.416,105.825 ; 270.496,106.008 270.496,107.449 276.765,113.719 276.765,116.459 277.104,116.797 284.191,116.797 284.419,117.025 ; 275.576,93.963 275.576,105.825 ; 285.02,121.515 156.555,121.515 153.38,124.69 ; 294.642,93.649 294.642,105.511
Mechanical1:
  circle w0.254: c312.76,160.45 r1.7
  circle w0.254: c312.76,92.45 r1.7
  circle w0.254: c193.936,105.786 r1.7
  circle w0.254: c147.76,92.45 r1.7
  circle w0.254: c147.76,160.45 r1.7
  circle w0.254: c190.453,74.271 r1.7
  circle w0.254: c280.453,74.271 r1.7
  circle w0.254: c190.453,45.271 r1.7
  circle w0.254: c280.453,45.271 r1.7
  circle w0.254: c280.453,-2.729 r1.7
  circle w0.254: c190.453,-2.729 r1.7
  circle w0.254: c280.453,26.271 r1.7
  circle w0.254: c190.453,26.271 r1.7
  circle w0.254: c75.815,25.509 r1.7
  circle w0.254: c165.815,25.509 r1.7
  circle w0.254: c75.815,-3.491 r1.7
  circle w0.254: c165.815,-3.491 r1.7
  circle w0.254: c165.815,44.509 r1.7
  circle w0.254: c75.815,44.509 r1.7
  circle w0.254: c165.815,73.509 r1.7
  circle w0.254: c75.815,73.509 r1.7
  circle w0.254: c0.848,92.5 r1.7
  circle w0.254: c0.848,160.5 r1.7
  circle w0.254: c138.848,160.5 r1.7
  circle w0.254: c136.848,92.5 r1.7
  lines w0.254: -5.152,92 ccw(c-1.652,92) -1.652,88.5 ; -5.152,163 cw(c-1.652,163) -1.652,166.5 ; 72.815,-5.991 ccw(c76.315,-5.991) 76.315,-9.491 ; 72.815,35.009 cw(c76.315,35.009) 76.315,38.509 ; 72.815,42.009 ccw(c76.315,42.009) 76.315,38.509 ; 72.815,83.009 cw(c76.315,83.009) 76.315,86.509 ; 139.348,88.5 ccw(c139.348,92) 142.848,92 ; 139.348,166.5 cw(c139.348,163) 142.848,163 ; 143.61,92 ccw(c147.11,92) 147.11,88.5 ; 143.61,163 cw(c147.11,163) 147.11,166.5 ; 165.315,-9.491 ccw(c165.315,-5.991) 168.815,-5.991 ; 165.315,38.509 cw(c165.315,35.009) 168.815,35.009 ; 165.315,38.509 ccw(c165.315,42.009) 168.815,42.009 ; 165.315,86.509 cw(c165.315,83.009) 168.815,83.009 ; 187.453,-5.229 ccw(c190.953,-5.229) 190.953,-8.729 ; 187.453,35.771 cw(c190.953,35.771) 190.953,39.271 ; 187.453,42.771 ccw(c190.953,42.771) 190.953,39.271 ; 187.453,83.771 cw(c190.953,83.771) 190.953,87.271 ; 279.953,-8.729 ccw(c279.953,-5.229) 283.453,-5.229 ; 279.953,39.271 cw(c279.953,35.771) 283.453,35.771 ; 279.953,39.271 ccw(c279.953,42.771) 283.453,42.771 ; 279.953,87.271 cw(c279.953,83.771) 283.453,83.771 ; 312.11,88.5 ccw(c312.11,92) 315.61,92 ; 312.11,166.5 cw(c312.11,163) 315.61,163 ; 72.815,38.509 168.815,38.509 ; 72.815,38.509 72.815,-9.491 168.815,-9.491 168.815,38.509 ; 72.815,38.509 168.815,38.509 ; 72.815,38.509 72.815,86.509 168.815,86.509 168.815,38.509 ; 187.453,39.271 187.453,87.271 283.453,87.271 283.453,39.271 ; 187.453,39.271 283.453,39.271 ; 187.453,39.271 187.453,-8.729 283.453,-8.729 283.453,39.271 ; 187.453,39.271 283.453,39.271 ; -5.152,88.5 -5.152,166.5 142.848,166.5 142.848,88.5 -5.152,88.5 ; 143.61,88.5 315.61,88.5 315.61,166.5 143.61,166.5 143.61,88.5
  text "PCB名称: CL-HC-C-V2.0" at -1.969,200.932 h3.05
  text "PCB名称: CL-HC-B-V2.0" at 147.793,200.932 h3.05
  text "尺寸： 14.8CM*7.8CM" at -1.967,197.429 h3.05
  text "尺寸： 17.2CM*7.8CM" at 147.795,197.429 h3.05
  text "板材：  FR4" at -1.967,193.901 h3.05
  text "板材：  FR4" at 147.795,193.901 h3.05
  text "板子层数：  2" at -1.967,190.392 h3.05
  text "板子层数：  2" at 147.795,190.392 h3.05
  text "板子厚度：  1.6" at -1.967,186.857 h3.05
  text "板子厚度：  1.6" at 147.795,186.857 h3.05
  text "阻焊颜色：  蓝色" at -1.969,183.346 h3.05
  text "阻焊颜色：  蓝色" at 147.793,183.346 h3.05
  text "铜箔厚度：  h/hoz" at -1.969,179.811 h3.05
  text "铜箔厚度：  h/hoz" at 147.793,179.811 h3.05
  text "阻焊覆盖：  过孔盖油" at -1.969,176.285 h3.05
  text "阻焊覆盖：  过孔盖油" at 147.793,176.285 h3.05
  text "字符颜色：  白色" at -1.967,172.776 h3.05
  text "字符颜色：  白色" at 147.795,172.776 h3.05
  text "焊盘喷镀：  有铅喷锡" at -1.967,169.245 h3.05
  text "焊盘喷镀：  有铅喷锡" at 147.795,169.245 h3.05
  text "PCB名称: CL-HC-A-V2.0" at 287.253,79.476 h3.05
  text "PCB名称: CL-HC-A-V2.0" at 41.677,77.441 h3.05
  text "尺寸： 9.6CM*9.6CM" at 287.256,75.973 h3.05
  text "尺寸： 9.6CM*9.6CM" at 41.68,73.938 h3.05
  text "板材：  FR4" at 287.256,72.444 h3.05
  text "板材：  FR4" at 41.68,70.41 h3.05
  text "板子层数：  2" at 287.256,68.935 h3.05
  text "板子层数：  2" at 41.68,66.901 h3.05
  text "板子厚度：  1.6" at 287.256,65.401 h3.05
  text "板子厚度：  1.6" at 41.68,63.366 h3.05
  text "阻焊颜色：  蓝色" at 287.253,61.889 h3.05
  text "阻焊颜色：  蓝色" at 41.677,59.855 h3.05
  text "铜箔厚度：  h/hoz" at 287.253,58.354 h3.05
  text "铜箔厚度：  h/hoz" at 41.677,56.32 h3.05
  text "阻焊覆盖：  过孔盖油" at 287.253,54.828 h3.05
  text "阻焊覆盖：  过孔盖油" at 41.677,52.794 h3.05
  text "字符颜色：  白色" at 287.256,51.32 h3.05
  text "字符颜色：  白色" at 41.68,49.285 h3.05
  text "焊盘喷镀：  有铅喷锡" at 287.256,47.788 h3.05
  text "焊盘喷镀：  有铅喷锡" at 41.68,45.754 h3.05
DrillDrawing:
  text ".legend" at 325.318,19.015 h2.03

## Text inside footprints (layer, text, board x,y; h text height)
LX1: TopOverlay "+" at 74.387,153.328 h1.52 r270
UB1: TopOverlay "~" at 71.374,156.972 h1.52; TopOverlay "+" at 69.126,159.769 h1.52; TopOverlay "-" at 73.7,159.757 h1.52; TopOverlay "~" at 71.374,161.036 h1.52